# EAGLE board PCB (EAGLE 9.7.0)
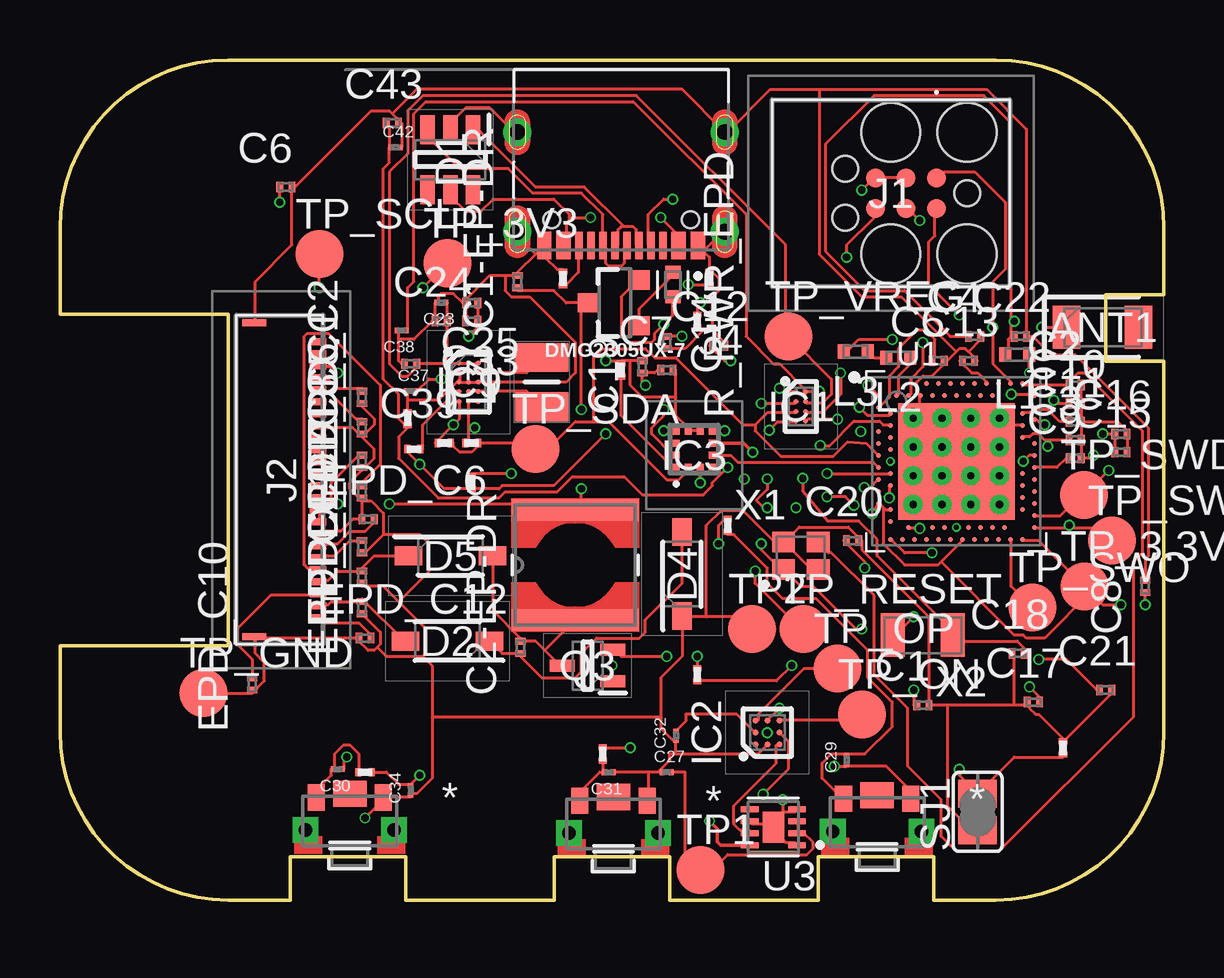
[diagram p0: board, top side]
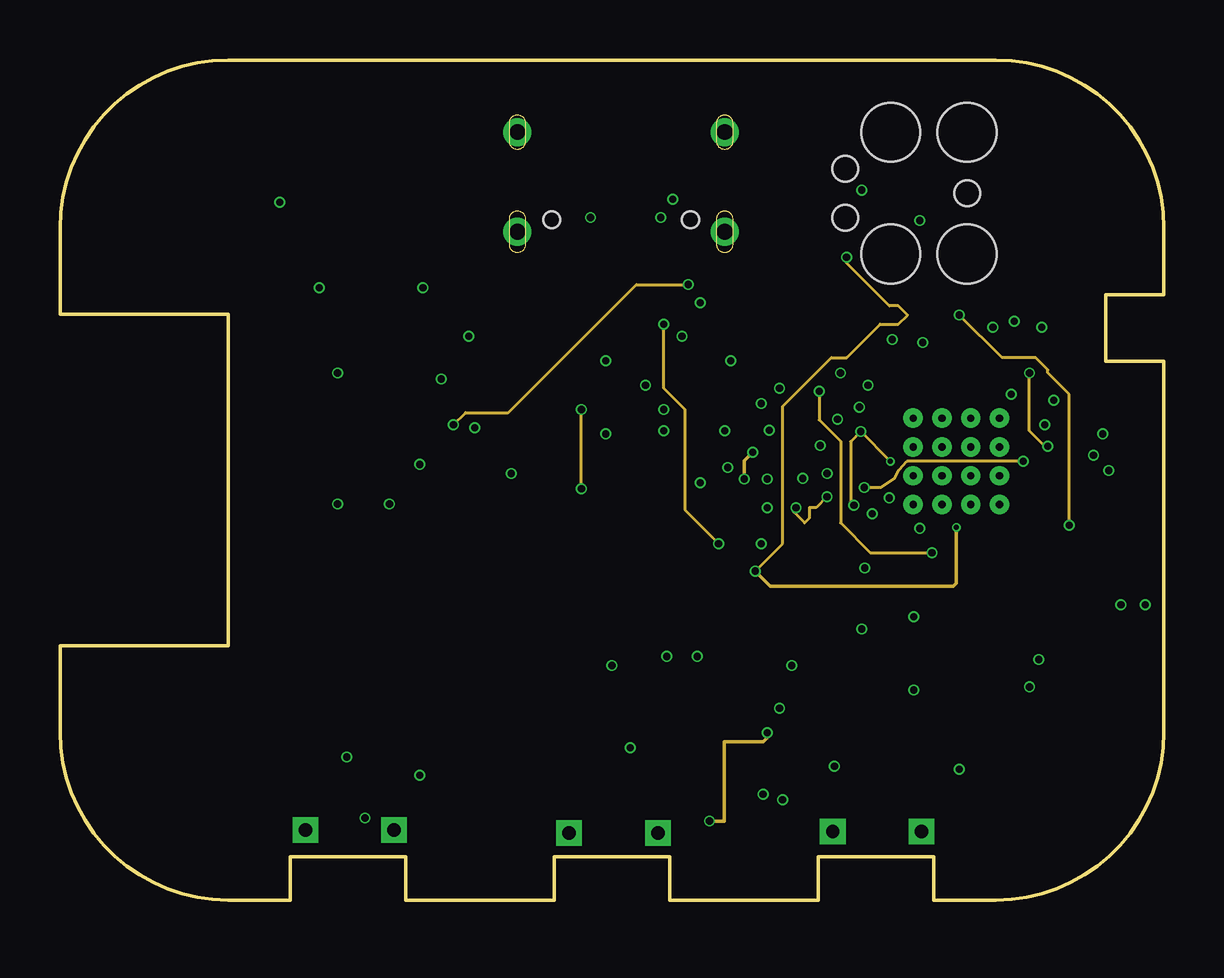
[diagram p1: board, inner layer Route2]
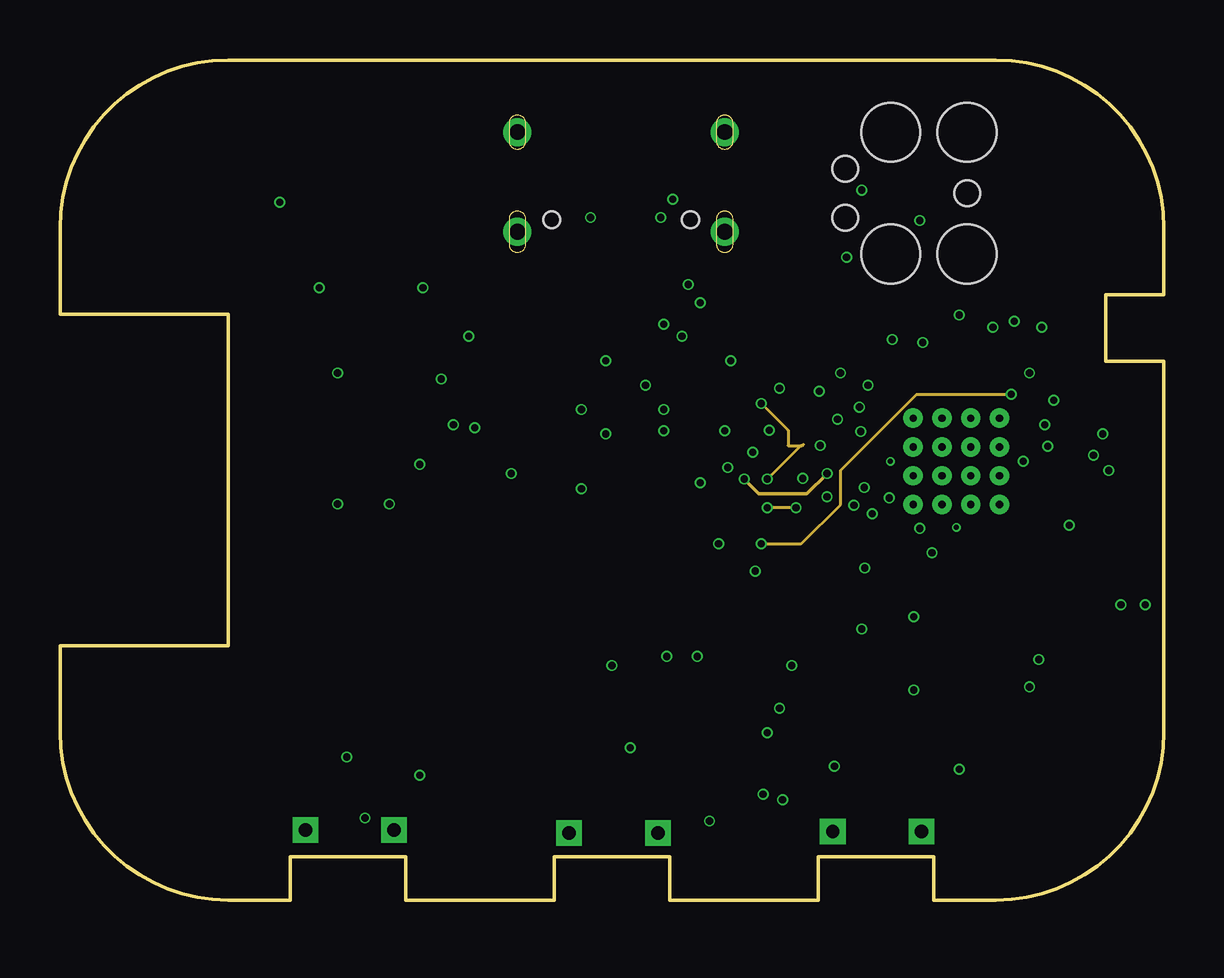
[diagram p2: board, inner layer Route63]
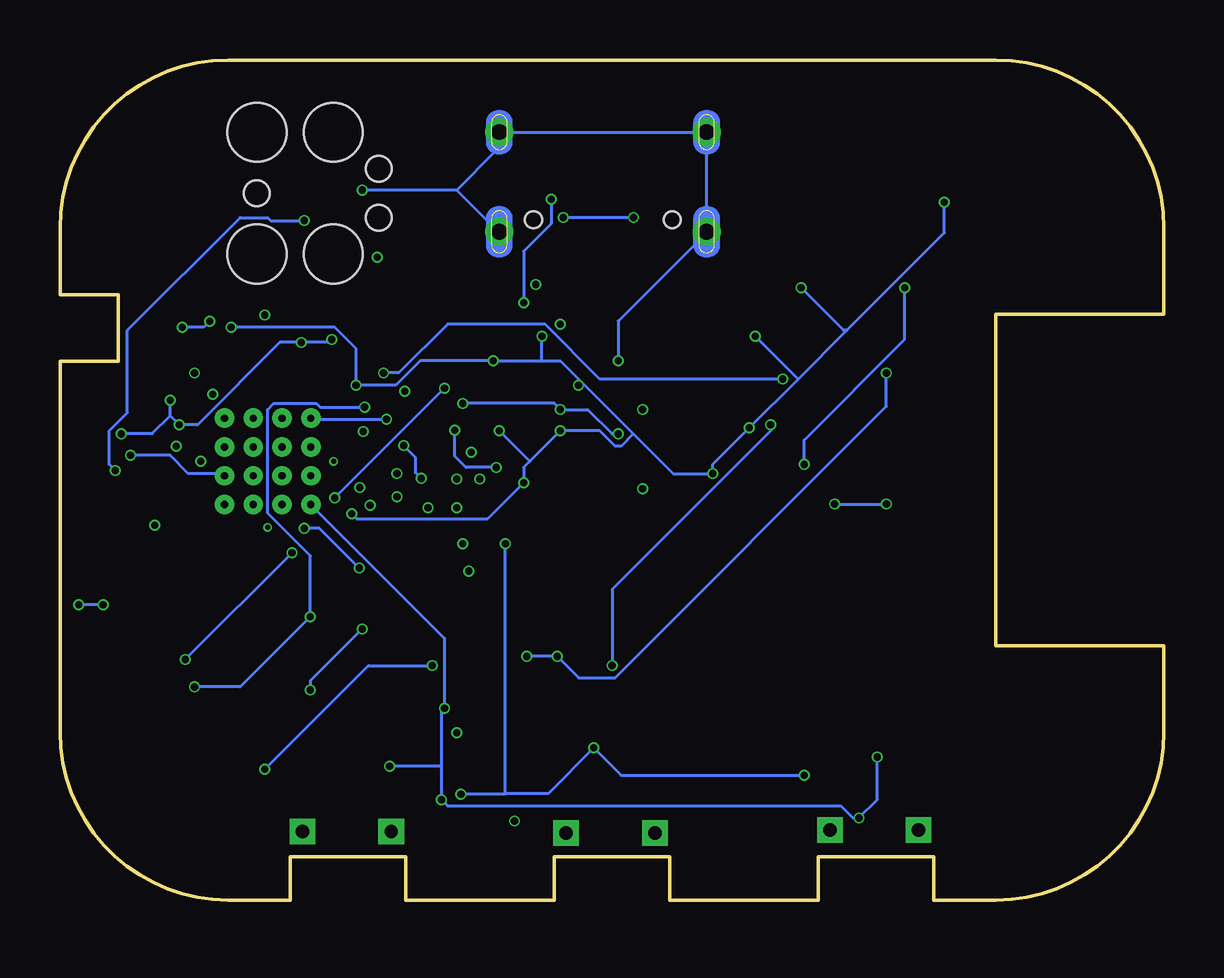
[diagram p3: board, bottom side, seen from below]

Size 46 x 35 mm. Coordinates in mm from the lower left corner, seen from the top.
Outline: 39,0 36.4,0 36.4,1.8 31.6,1.8 31.6,0 25.4,0 25.4,1.8 20.6,1.8 20.6,0 14.4,0 14.4,1.8 9.6,1.8 9.6,0 7,0 arc-90 0,7 0,10.6 7,10.6 7,24.4 0,24.4 0,28 arc-90 7,35 39,35 arc-90 46,28 46,25.23 43.57,25.23 43.57,22.45 46,22.45 46,7 arc-90 39,0
Copper layers (1+2*15+16): Top / Route2 / Route63 / Bottom
Stack-up 4 Layer Stack: Top SilkScreen Epoxy Ink / Top SolderMask SR:Green 0.0254mm Dk 4.3 / Top Surface Finish Lead-Free 0.02mm / Top CuFoil:007 0.035mm / Dielectric-1 Prepreg:001 0.064mm / Dielectric-2 Prepreg:001 0.064mm / Route2 CuFoil:007 0.035mm / Dielectric-3 Core:066 0.711mm / Route63 CuFoil:007 0.035mm / Dielectric-4 Prepreg:001 0.064mm / Dielectric-5 Prepreg:001 0.064mm / Bottom CuFoil:007 0.035mm / Bottom Surface Finish Lead-Free 0.02mm / Bottom SolderMask SR:Green 0.0254mm Dk 4.3 / Bottom SilkScreen Epoxy Ink
Design rules: minimum copper width 5mil, minimum drill size 0.3mm, copper clearance wire_polygon to wire_polygon 5mil, copper clearance wire_polygon to pad_smd 5mil, copper clearance wire_polygon to via 5mil, copper clearance pad_smd to pad_smd 5mil, copper clearance pad_smd to via 5mil, copper clearance via to via 5mil, copper clearance smd to pad (same net) 5mil, copper clearance smd to via (same net) 5mil, copper clearance smd to smd (same net) 5mil, dimension clearance 0.2mm, via restrict clearance 0mil, restrict clearance 0mil, drill distance 6mil, keepout clearance 0mil

## Footprints (pad centres in the part's own frame; a part is rotated, then mirrored left to right if it is on the bottom)
2450AT18B100E_ANTC3216X140N = smd 1.15 x 1.8: 1 -1.5,0; 2 1.5,0
NORDIC_NRF_3_RESC0201_L = smd 0.28 x 0.43: 1 -0.255,0; 2 0.255,0
GRM011R60J152KE01L_2_CAPC0201X13N = smd 0.22 x 0.23: 1 -0.185,0; 2 0.185,0
ESP32_C6_LIBRARY_3_SOT95P280X145-6N = smd 1.2 x 0.6: 1 -1.25,0.95; 2 -1.25,0; 3 -1.25,-0.95; 4 1.25,-0.95; 5 1.25,0; 6 1.25,0.95
ESP32_C6_LIBRARY_5_SOD3716X135N = smd 1.15 x 0.8: 1 -1.75,0; 2 1.75,0
ESP32_C6_LIBRARY_4_ESP32_C6_LIBRARY_4_ESP32_C6_LIBRARY_4_ESP32_C6_LIBRARY_4_ESP32_WROVER_SPARKFUN-DISCRETESEMI_SOT23-3 = smd 0.8 x 0.9: 1 -0.95,-1; 2 0.95,-1; 3 0,1.1
BQ25180YBGR_BGA8C40P2X4_100X155X50 = smd 0.2 x 0.2: A1 -0.2,0.6; A2 0.2,0.6; B1 -0.2,0.2; B2 0.2,0.2; C1 -0.2,-0.2; C2 0.2,-0.2; D1 -0.2,-0.6; D2 0.2,-0.6
DRV2605YZFR_BGA9C50P3X3_144X144X62 = smd 0.25 x 0.25: A1 -0.5,0.5; A2 0,0.5; A3 0.5,0.5; B1 -0.5,0; B2 0,0; B3 0.5,0; C1 -0.5,-0.5; C2 0,-0.5; C3 0.5,-0.5
BMA423_BMA423 = smd 0.3 x 0.35: 1 -0.75,-0.775; 2 -0.25,-0.775; 3 0.25,-0.775; 4 0.75,-0.775; 7 0.75,0.775; 8 0.25,0.775; 9 -0.25,0.775; 10 -0.75,0.775 | smd 0.35 x 0.3: 5 0.775,-0.25; 6 0.775,0.25; 11 -0.775,0.25; 12 -0.775,-0.25
RT6160AWSC_BGA15C40P3X5_140X230X60 = smd 0.216 x 0.216: A1 -0.4,0.8; A2 0,0.8; A3 0.4,0.8; B1 -0.4,0.4; B2 0,0.4; B3 0.4,0.4; C1 -0.4,0; C2 0,0; C3 0.4,0; D1 -0.4,-0.4; D2 0,-0.4; D3 0.4,-0.4; E1 -0.4,-0.8; E2 0,-0.8; E3 0.4,-0.8
TC2030-IDC_TC2030IDC = smd 0.783 x 0.783: 1 -0.953,-0.635; 2 -0.953,0.635; 3 0.317,-0.635; 4 0.317,0.635; 5 1.588,-0.635; 6 1.588,0.635 | hole 2.451: -2.223,-2.54; -2.223,2.54; 0.952,-2.54; 0.952,2.54 | hole 1.067: -2.223,0; 2.857,-1.016; 2.857,1.016
503480-2400_5034802400 = smd 0.3 x 0.7: 1 -5.75,1.525; 2 -5.25,1.525; 3 -4.75,1.525; 4 -4.25,1.525; 5 -3.75,1.525; 6 -3.25,1.525; 7 -2.75,1.525; 8 -2.25,1.525; 9 -1.75,1.525; 10 -1.25,1.525; 11 -0.75,1.525; 12 -0.25,1.525; 13 0.25,1.525; 14 0.75,1.525; 15 1.25,1.525; 16 1.75,1.525; 17 2.25,1.525; 18 2.75,1.525; 19 3.25,1.525; 20 3.75,1.525; 21 4.25,1.525; 22 4.75,1.525; 23 5.25,1.525; 24 5.75,1.525 | smd 0.3 x 1: MP1 -6.54,-1.125; MP2 6.54,-1.125
KH-TYPE-C-16P_KINGHELM_KH-TYPE-C-16P = smd 0.6 x 1.15: A1_B12 -3.2,4.725; A4_B9 -2.4,4.725; A9_B4 2.4,4.725; A12_B1 3.2,4.725 | smd 0.3 x 1.15: A5 -1.25,4.725; A6 -0.25,4.725; A7 0.25,4.725; A8 1.25,4.725; B5 1.75,4.725; B6 0.75,4.725; B7 -0.75,4.725; B8 -1.75,4.725 | drill 0.65 pad 1.05: SH1 -4.32,0; SH2 4.32,0; SH3 -4.32,4.15; SH4 4.32,4.15 | hole 0.7: -2.89,3.65; 2.89,3.65
NORDIC_NRF_2_RESC0402_L = smd 0.5 x 0.6: 1 -0.5,0; 2 0.5,0
ESP32_C6_LIBRARY_2_IND_4828-WE-TPC_WRE = smd 0.9 x 5.3: 1 -2.286,0; 2 2.286,0
MLP2016SR47MT0S1_INDC2016X100N = smd 1.2 x 2.2: 1 -1.028,0; 2 1.028,0
ESP32_C6_LIBRARY_6_SOT65P210X110-3N = smd 1.05 x 0.5: 1 -1.05,0.65; 2 -1.05,-0.65; 3 1.05,0
CPF0201D7K68C1_0201 = smd 0.35 x 0.25: 1 0,0.275; 2 0,-0.275
RESC1005X40 = smd 0.535 x 0.644: 1 -0.507,0; 2 0.507,0
ESP32_C6_LIBRARY_7_JUMPER_SJ = smd 1.168 x 1.6: 1 -0.762,0; 2 0.762,0
2025-10-22_07-23-44_LIBRARY_SW_EVP-AKE31A_PAN = smd 0.711 x 1.092: 1 -1.4,-0.972; 2 1.4,-0.972 | drill 0.559 pad 0.914 square: 3 -1.848,0.381; 4 1.848,0.381 | smd 1.397 x 1.092: 5 0,-1.124
HECTOR_WATCH_1_TP20R = smd 2 x 2: TP 0,0
NORDIC_NRF_4_AQFN50P700X700X85_HS-74N = smd 4.85 x 4.85: P$74 0,0 | drill 0.3 pad 0.6: P$75 -1.8,1.8; P$76 -0.6,1.8; P$77 0.6,1.8; P$78 1.8,1.8; P$79 -1.8,0.6; P$80 -0.6,0.6; P$81 0.6,0.6; P$82 1.8,0.6; P$83 -1.8,-0.6; P$84 -0.6,-0.6; P$85 0.6,-0.6; P$86 1.8,-0.6; P$87 -1.8,-1.8; P$88 -0.6,-1.8; P$89 0.6,-1.8; P$90 1.8,-1.8 | smd 0.2 x 0.2: P$A8 -1.25,3.25; P$A10 -0.75,3.25; P$A12 -0.25,3.25; P$A14 0.25,3.25; P$A16 0.75,3.25; P$A18 1.25,3.25; P$A20 1.75,3.25; P$A22 2.25,3.25; P$A23 2.75,3.25; P$AA24 3.25,-2.25; P$AB2 -2.75,-2.5; P$AC5 -2,-2.75; P$AC9 -1,-2.75; P$AC11 -0.5,-2.75; P$AC13 0,-2.75; P$AC15 0.5,-2.75; P$AC17 1,-2.75; P$AC19 1.5,-2.75; P$AC21 2,-2.75; P$AC24 3.25,-2.75; P$AD2 -2.75,-3.25; P$AD4 -2.25,-3.25; P$AD6 -1.75,-3.25; P$AD8 -1.25,-3.25; P$AD10 -0.75,-3.25; P$AD12 -0.25,-3.25; P$AD14 0.25,-3.25; P$AD16 0.75,-3.25; P$AD18 1.25,-3.25; P$AD20 1.75,-3.25; P$AD22 2.25,-3.25; P$AD23 2.75,-3.25; P$B1 -3.25,2.75; P$B3 -2.5,2.75; P$B5 -2,2.75; P$B7 -1.5,2.75; P$B9 -1,2.75; P$B11 -0.5,2.75; P$B13 0,2.75; P$B15 0.5,2.75; P$B17 1,2.75; P$B19 1.5,2.75; P$B24 3.25,2.75; P$C1 -3.25,2.25; P$D2 -2.75,2; P$D23 2.75,2; P$E24 3.25,1.75; P$F2 -2.75,1.5; P$F23 2.75,1.5; P$G1 -3.25,1.25; P$H2 -2.75,1; P$H23 2.75,1; P$J1 -3.25,0.75; P$J24 3.25,0.75; P$K2 -2.75,0.5; P$L1 -3.25,0.25; P$L24 3.25,0.25; P$M2 -2.75,0; P$N1 -3.25,-0.25; P$N24 3.25,-0.25; P$P2 -2.75,-0.5; P$P23 2.75,-0.5; P$R1 -3.25,-0.75; P$R24 3.25,-0.75; P$T2 -2.75,-1; P$T23 2.75,-1; P$U1 -3.25,-1.25; P$U24 3.25,-1.25; P$V23 2.75,-1.5; P$W1 -3.25,-1.75; P$W24 3.25,-1.75; P$Y2 -2.75,-2; P$Y23 2.75,-2
ESP32_C6_LIBRARY_SON50P200X200X80-9N = smd 0.76 x 0.27: 1 -0.985,0.75; 2 -0.985,0.25; 3 -0.985,-0.25; 4 -0.985,-0.75; 5 0.985,-0.75; 6 0.985,-0.25; 7 0.985,0.25; 8 0.985,0.75 | smd 0.9 x 1.3: 9 0,0
NORDIC_NRF_BT-XTAL_2016_N = smd 0.95 x 0.85: 1 -0.725,-0.575; 2 0.725,-0.575; 3 0.725,0.575; 4 -0.725,0.575
NORDIC_NRF_1_XTAL_3215_N = smd 1 x 1.8: 1 -1.25,0; 2 1.25,0

## Placement (x,y rotation side)
ANT1  2450AT18B100E  [2450AT18B100E_ANTC3216X140N]  43.44,23.86 0 top
C1  12pF  [NORDIC_NRF_3_RESC0201_L]  35.95,8.12 0 top
C1-EP-DR  10uF  [NORDIC_NRF_3_RESC0201_L]  19.06,25.77 90 top
C2  12pF  [NORDIC_NRF_3_RESC0201_L]  42.3,21.45 0 top
C2-EP-DR  4.7uF/25V  [NORDIC_NRF_3_RESC0201_L]  19.19,10.53 90 top
C3  1pF  [NORDIC_NRF_3_RESC0201_L]  42.3,19.17 0 top
C4  1pF  [NORDIC_NRF_3_RESC0201_L]  38.11,23.48 0 top
C5  100nF  [NORDIC_NRF_3_RESC0201_L]  36.59,22.47 0 top
C6  4.7μF  [NORDIC_NRF_3_RESC0201_L]  9.41,29.71 0 top
C7  100nF  [NORDIC_NRF_3_RESC0201_L]  25.28,22.09 0 top
C8  100nF  [NORDIC_NRF_3_RESC0201_L]  45.22,13.07 90 top
C9  820pF  [NORDIC_NRF_3_RESC0201_L]  42.3,18.4 0 top
C10  N.C  [NORDIC_NRF_3_RESC0201_L]  42.3,20.69 0 top
C11  100pF  [NORDIC_NRF_3_RESC0201_L]  42.3,19.93 0 top
C12  100nF  [NORDIC_NRF_3_RESC0201_L]  27.44,23.1 0 top
C13  N.C  [NORDIC_NRF_3_RESC0201_L]  37.85,22.47 0 top
C14  4.7μH  [NORDIC_NRF_3_RESC0201_L]  25.28,23.23 270 top
C15  1.0μF  [NORDIC_NRF_3_RESC0201_L]  44.2,18.66 0 top
C16  47nF  [NORDIC_NRF_3_RESC0201_L]  44.2,19.42 0 top
C17  12pF  [NORDIC_NRF_3_RESC0201_L]  40.56,8.24 0 top
C18  12pF  [NORDIC_NRF_3_RESC0201_L]  39.93,10.28 0 top
C19  100nF  [NORDIC_NRF_3_RESC0201_L]  24.27,22.21 90 top
C20  4.7μF  [NORDIC_NRF_3_RESC0201_L]  33.03,14.98 0 top
C21  4.7μF  [NORDIC_NRF_3_RESC0201_L]  43.57,8.75 0 top
C22  N.C  [NORDIC_NRF_3_RESC0201_L]  40.01,23.48 0 top
C23  0.1uF  [GRM011R60J152KE01L_2_CAPC0201X13N]  15.88,24.9 180 top
C24  10uF  [NORDIC_NRF_3_RESC0201_L]  15.88,24.12 0 top
C25  22uF  [NORDIC_NRF_3_RESC0201_L]  17.15,24.88 180 top
C27  0.1uF  [GRM011R60J152KE01L_2_CAPC0201X13N]  25.28,5.32 0 top
C29  1uF  [GRM011R60J152KE01L_2_CAPC0201X13N]  32.77,5.83 90 top
C30  1uF  [GRM011R60J152KE01L_2_CAPC0201X13N]  11.57,5.45 180 top
C31  1uF  [GRM011R60J152KE01L_2_CAPC0201X13N]  22.87,5.32 180 top
C32  1uF  [GRM011R60J152KE01L_2_CAPC0201X13N]  25.66,6.85 90 top
C33  22uF  [NORDIC_NRF_3_RESC0201_L]  17.15,24.12 180 top
C34  0.1uF  [GRM011R60J152KE01L_2_CAPC0201X13N]  14.61,4.56 90 top
C37  1uF  [GRM011R60J152KE01L_2_CAPC0201X13N]  14.61,21.2 0 top
C38  1uF  [GRM011R60J152KE01L_2_CAPC0201X13N]  14.23,23.74 180 top
C39  10uF  [NORDIC_NRF_3_RESC0201_L]  14.61,22.34 180 top
C42  0.1uF  [GRM011R60J152KE01L_2_CAPC0201X13N]  13.98,31.36 0 top
C43  4.7uF  [NORDIC_NRF_3_RESC0201_L]  13.85,32.37 0 top
D1  USBLC6-2SC6Y  [ESP32_C6_LIBRARY_3_SOT95P280X145-6N]  16.26,30.85 270 top
D2  MBR0530  [ESP32_C6_LIBRARY_5_SOD3716X135N]  16.14,10.78 180 top
D4  MBR0530  [ESP32_C6_LIBRARY_5_SOD3716X135N]  25.92,13.58 90 top
D5  MBR0530  [ESP32_C6_LIBRARY_5_SOD3716X135N]  16.26,14.34 0 top
DMG2305UX-7  20V/4.2A/52mΩ/1.4W  [ESP32_C6_LIBRARY_4_ESP32_C6_LIBRARY_4_ESP32_C6_LIBRARY_4_ESP32_C6_LIBRARY_4_ESP32_WROVER_SPARKFUN-DISCRETESEMI_SOT23-3]  23.12,24.88 90 top
EPD_C1  1uF/50V  [NORDIC_NRF_3_RESC0201_L]  12.58,19.67 90 top
EPD_C2  1uF/50V  [NORDIC_NRF_3_RESC0201_L]  12.58,20.94 90 top
EPD_C5  0.1uF/50V  [NORDIC_NRF_3_RESC0201_L]  12.58,18.28 90 top
EPD_C6  1uF/50V  [NORDIC_NRF_3_RESC0201_L]  12.84,15.86 0 top
EPD_C7  1uF/50V  [NORDIC_NRF_3_RESC0201_L]  12.58,14.72 90 top
EPD_C8  1uF/50V  [NORDIC_NRF_3_RESC0201_L]  12.58,17.01 90 top
EPD_C9  1uF/50V  [NORDIC_NRF_3_RESC0201_L]  12.58,13.45 90 top
EPD_C10  1uF/50V  [NORDIC_NRF_3_RESC0201_L]  8.01,9.01 90 top
EPD_C11  1uF/50V  [NORDIC_NRF_3_RESC0201_L]  12.58,12.18 90 top
EPD_C12  1uF/50V  [NORDIC_NRF_3_RESC0201_L]  12.71,10.91 0 top
IC1  BQ25180YBGR  [BQ25180YBGR_BGA8C40P2X4_100X155X50]  30.87,20.56 0 top
IC2  DRV2605YZFR  [DRV2605YZFR_BGA9C50P3X3_144X144X62]  29.47,6.97 90 top
IC3  BMA421  [BMA423_BMA423]  26.43,18.78 0 top
IC9  RT6160AWSC  [RT6160AWSC_BGA15C40P3X5_140X230X60]  17.03,21.58 0 top
J1  TC2030-IDC  [TC2030-IDC_TC2030IDC]  35.57,29.45 180 top
J2  503480-2400  [503480-2400_5034802400]  9.23,17.52 270 top
J4  KH-TYPE-C-16P  [KH-TYPE-C-16P_KINGHELM_KH-TYPE-C-16P]  23.38,31.99 180 top
L1  3.9nH  [NORDIC_NRF_2_RESC0402_L]  39.89,22.72 180 top
L2  10μH  [NORDIC_NRF_2_RESC0402_L]  34.93,22.59 180 top
L3  15nH  [NORDIC_NRF_2_RESC0402_L]  33.16,22.85 180 top
L5  68uH  [ESP32_C6_LIBRARY_2_IND_4828-WE-TPC_WRE]  21.47,13.96 90 top
L7  FTC252012SR47MBCA  [MLP2016SR47MT0S1_INDC2016X100N]  20.07,21.58 270 top
Q3  SI1308EDL-T1-GE3  [ESP32_C6_LIBRARY_6_SOT65P210X110-3N]  21.98,9.77 180 top
R1_EP_DR  0.47  [CPF0201D7K68C1_0201]  26.55,9.39 180 top
R1_USB  5K1  [CPF0201D7K68C1_0201]  26.55,24.12 180 top
R2  0  [CPF0201D7K68C1_0201]  16.01,19.04 270 top
R2_EP_DR  10K  [CPF0201D7K68C1_0201]  27.06,25.9 0 top
R2_USB  5K1  [CPF0201D7K68C1_0201]  20.96,25.9 180 top
R3  0  [CPF0201D7K68C1_0201]  23.38,22.09 0 top
R4  0  [CPF0201D7K68C1_0201]  14.74,18.78 90 top
R5  10K  [CPF0201D7K68C1_0201]  12.71,5.32 90 top
R7  10K  [CPF0201D7K68C1_0201]  27.82,15.61 180 top
R8  10K  [CPF0201D7K68C1_0201]  22.62,6.09 180 top
R9  10K  [CPF0201D7K68C1_0201]  14.49,20.05 0 top
R17  3K3  [CPF0201D7K68C1_0201]  17.15,17.39 0 top
R18  3K3  [CPF0201D7K68C1_0201]  17.15,19.04 90 top
R_PWR_EPD  10K  [RESC1005X40]  25.54,25.64 270 top
R_TYPE_SEL  2.2  [CPF0201D7K68C1_0201]  41.79,6.34 0 top
SJ1  [ESP32_C6_LIBRARY_7_JUMPER_SJ]  38.24,3.67 90 top
SW_DN  2025-10-22_07-23-44_LIBRARY_EVP-AKE31ASW_EVP-AKE31A_PAN  [2025-10-22_07-23-44_LIBRARY_SW_EVP-AKE31A_PAN]  34.04,3.24 180 top
SW_ENT  2025-10-22_07-23-44_LIBRARY_EVP-AKE31ASW_EVP-AKE31A_PAN  [2025-10-22_07-23-44_LIBRARY_SW_EVP-AKE31A_PAN]  23.06,3.17 180 top
SW_UP  2025-10-22_07-23-44_LIBRARY_EVP-AKE31ASW_EVP-AKE31A_PAN  [2025-10-22_07-23-44_LIBRARY_SW_EVP-AKE31A_PAN]  12.07,3.3 180 top
TP1  HECTOR_WATCH_1_TPTP20R  [HECTOR_WATCH_1_TP20R]  26.68,1.26 0 top
TP2  HECTOR_WATCH_1_TPTP20R  [HECTOR_WATCH_1_TP20R]  28.84,11.29 0 top
TP_3.3V  HECTOR_WATCH_1_TPTP20R  [HECTOR_WATCH_1_TP20R]  42.68,13.07 0 top
TP_3V3  HECTOR_WATCH_1_TPTP20R  [HECTOR_WATCH_1_TP20R]  16.14,26.53 0 top
TP_GND  HECTOR_WATCH_1_TPTP20R  [HECTOR_WATCH_1_TP20R]  5.98,8.62 0 top
TP_ON  HECTOR_WATCH_1_TPTP20R  [HECTOR_WATCH_1_TP20R]  33.41,7.74 0 top
TP_OP  TP_OP  [HECTOR_WATCH_1_TP20R]  32.39,9.64 0 top
TP_RESET  HECTOR_WATCH_1_TPTP20R  [HECTOR_WATCH_1_TP20R]  30.99,11.29 0 top
TP_SCL  HECTOR_WATCH_1_TPTP20R  [HECTOR_WATCH_1_TP20R]  10.8,26.91 0 top
TP_SDA  HECTOR_WATCH_1_TPTP20R  [HECTOR_WATCH_1_TP20R]  19.82,18.78 0 top
TP_SWDCLK  HECTOR_WATCH_1_TPTP20R  [HECTOR_WATCH_1_TP20R]  42.67,16.88 0 top
TP_SWDIO  HECTOR_WATCH_1_TPTP20R  [HECTOR_WATCH_1_TP20R]  43.82,14.98 0 top
TP_SWO  HECTOR_WATCH_1_TPTP20R  [HECTOR_WATCH_1_TP20R]  40.52,12.18 0 top
TP_VREG  HECTOR_WATCH_1_TPTP20R  [HECTOR_WATCH_1_TP20R]  30.36,23.48 0 top
U1  NRF52840_QF  [NORDIC_NRF_4_AQFN50P700X700X85_HS-74N]  37.35,18.28 0 top
U3  MAX17048G+T10  [ESP32_C6_LIBRARY_SON50P200X200X80-9N]  29.73,3.04 180 top
X1  32MHz  [NORDIC_NRF_BT-XTAL_2016_N]  30.87,14.34 0 top
X2  32.768kHz  [NORDIC_NRF_1_XTAL_3215_N]  35.95,11.04 180 top

## Library data of the parts
ANT1 = InkTime_v5; ARROW_PART_NUMBER: 2450AT18B100E; ARROW_PRICE-STOCK: https://www.arrow.com/en/products/2450at18b100e/johanson-dielectrics?utm_currency=USD&region=nac; DESCRIPTION: Antennas 2.45GHz ANTENNA; HEIGHT: 1.4mm; MANUFACTURER_NAME: JOHANSON TECHNOLOGY; MANUFACTURER_PART_NUMBER: 2450AT18B100E; MOUSER_PART_NUMBER: 609-2450AT18B100E; MOUSER_PRICE-STOCK: https://www.mouser.co.uk/ProductDetail/Johanson-Technology/2450AT18B100E?qs=yCnrNFeXz%252Bh5MFsFIXGZGA%3D%3D
C1 C1-EP-DR C2 C2-EP-DR C3-C22 C24 C25 C33 C39 C43 EPD_C1 EPD_C2 EPD_C5-EPD_C12 L1-L3 R1_EP_DR R1_USB R2 R2_EP_DR R2_USB R3-R5 R7-R9 R17 R18 R_TYPE_SEL SJ1 TP1 TP2 TP_3.3V TP_3V3 TP_GND TP_ON TP_OP TP_RESET TP_SCL TP_SDA TP_SWDCLK TP_SWDIO TP_SWO TP_VREG U1 X1 X2 = InkTime_v5
C23 C27 C29-C32 C34 C37 C38 C42 = InkTime_v5; AVAILABILITY: In Stock; CHECK_PRICES: https://www.snapeda.com/parts/GRM011R60J152KE01L/Murata/view-part/?ref=eda; DESCRIPTION: SMD Capacitor X5R(EIA) with Capacitance: 1500pF Tol. 10%. Rated Voltage: 6.3Vdc; MF: Murata; MP: GRM011R60J152KE01L; PACKAGE: 0201 Murata; PRICE: None; SNAPEDA_LINK: https://www.snapeda.com/parts/GRM011R60J152KE01L/Murata/view-part/?ref=snap
D1 = InkTime_v5; AVAILABILITY: In Stock; CHECK_PRICES: https://www.snapeda.com/parts/USBLC6-2SC6Y/STMicroelectronics/view-part/?ref=eda; DESCRIPTION: 17V Clamp 5A (8/20µs) Ipp Tvs Diode Surface Mount SOT-23-6; MF: STMicroelectronics; MP: USBLC6-2SC6Y; PACKAGE: SOT-23-6 STMicroelectronics; PRICE: None; SNAPEDA_LINK: https://www.snapeda.com/parts/USBLC6-2SC6Y/STMicroelectronics/view-part/?ref=snap
D2 D4 D5 = InkTime_v5; AVAILABILITY: In Stock; CHECK_PRICES: https://www.snapeda.com/parts/MBR0530/Onsemi/view-part/?ref=eda; DESCRIPTION: Diode Schottky 30 V 500mA Surface Mount SOD-123; MF: ON Semiconductor; MP: MBR0530; PACKAGE: SOD-123-2 ON Semiconductor; PRICE: None; PURCHASE-URL: https://www.snapeda.com/api/url_track_click_mouser/?unipart_id=179458&manufacturer=ON Semiconductor&part_name=MBR0530&search_term=None; SNAPEDA_LINK: https://www.snapeda.com/parts/MBR0530/Onsemi/view-part/?ref=snap
DMG2305UX-7 = InkTime_v5; PROD_ID: TRAN-14388
IC1 = InkTime_v5; ARROW_PART_NUMBER: BQ25180YBGR; ARROW_PRICE-STOCK: https://www.arrow.com/en/products/bq25180ybgr/texas-instruments?utm_currency=USD&region=nac; DESCRIPTION: Charger IC Lithium Ion/Polymer, Lithium Iron Phosphate 8-DSBGA (1.6x1.1); HEIGHT: 0.5mm; MANUFACTURER_NAME: Texas Instruments; MANUFACTURER_PART_NUMBER: BQ25180YBGR; MOUSER_PART_NUMBER: 595-BQ25180YBGR; MOUSER_PRICE-STOCK: https://www.mouser.co.uk/ProductDetail/Texas-Instruments/BQ25180YBGR?qs=doiCPypUmgEWjAK%252BJAX6Tw%3D%3D
IC2 = InkTime_v5; ARROW_PART_NUMBER: DRV2605YZFR; ARROW_PRICE-STOCK: https://www.arrow.com/en/products/drv2605yzfr/texas-instruments?region=nac; DESCRIPTION: Haptic Driver for ERM/LRA with Built-In Library and Smart Loop Architecture; HEIGHT: 0.625mm; MANUFACTURER_NAME: Texas Instruments; MANUFACTURER_PART_NUMBER: DRV2605YZFR
IC3 = InkTime_v5; ARROW_PART_NUMBER: BMA423; ARROW_PRICE-STOCK: https://www.arrow.com/en/products/bma423/bosch; DESCRIPTION: Accelerometers Triaxial low-g 12bit Acceleration Sensor; HEIGHT: 1mm; MANUFACTURER_NAME: BOSCH; MANUFACTURER_PART_NUMBER: BMA423; MOUSER_PART_NUMBER: 262-BMA423; MOUSER_PRICE-STOCK: https://www.mouser.co.uk/ProductDetail/Bosch-Sensortec/BMA423?qs=HXFqYaX1Q2xC%252BSgeGoX3mg%3D%3D
IC9 = InkTime_v5; DESCRIPTION: Buck-Boost Regulator Positive Output Step-Up/Step-Down I2C DC-DC Controller IC 15-WL-CSP (BSC) (1.4x2.3); HEIGHT: 0.6mm; MANUFACTURER_NAME: RICHTEK; MANUFACTURER_PART_NUMBER: RT6160AWSC; MOUSER_PART_NUMBER: 835-RT6160AWSC; MOUSER_PRICE-STOCK: https://www.mouser.co.uk/ProductDetail/Richtek/RT6160AWSC?qs=amGC7iS6iy%2FLd9PSoixZXQ%3D%3D
J1 = InkTime_v5; DESCRIPTION: CABLE ADAPTER 6 POS; HEIGHT: 19mm; MANUFACTURER_NAME: Tag Connect; MANUFACTURER_PART_NUMBER: TC2030-IDC
J2 = InkTime_v5; DESCRIPTION: FFC & FPC Connectors 0.5mm FPC RA SMT Dual Contact 24Ckt; HEIGHT: 1.87mm; MANUFACTURER_NAME: Molex; MANUFACTURER_PART_NUMBER: 503480-2400; MOUSER_PART_NUMBER: 538-503480-2400; MOUSER_PRICE-STOCK: https://www.mouser.co.uk/ProductDetail/Molex/503480-2400?qs=OAhjpuo3Vu7efIoxFh9AOw%3D%3D
J4 = InkTime_v5; AVAILABILITY: Not in stock; CHECK_PRICES: https://www.snapeda.com/parts/KH-TYPE-C-16P/Kinghelm/view-part/?ref=eda; MF: kinghelm; MP: KH-TYPE-C-16P; PACKAGE: None; PRICE: None; SNAPEDA_LINK: https://www.snapeda.com/parts/KH-TYPE-C-16P/Kinghelm/view-part/?ref=snap
L5 = InkTime_v5; COPYRIGHT: Copyright (C) 2024 Ultra Librarian. All rights reserved.; MANUFACTURER_PART_NUMBER: 744043680; MFR_NAME: Wurth Electronics
L7 = InkTime_v5; DESCRIPTION: SMD / SMT Inductors (Coils), L=0.47?H, L x W x T :; HEIGHT: 1mm; JLCPCB: https://jlcpcb.com/partdetail/6763488-FTC252012SR47MBCA/C5832368; MANUFACTURER_NAME: TDK; MANUFACTURER_PART_NUMBER: FTC252012SR47MBCA
Q3 = InkTime_v5; AVAILABILITY: In Stock; CHECK_PRICES: https://www.snapeda.com/parts/SI1308EDL-T1-GE3/Vishay+Siliconix/view-part/?ref=eda; DESCRIPTION: Si1308EDL-T1-GE3 N-channel MOSFET Transistor, 1.5 A, 30 V, 3-Pin SC-70 | Siliconix / Vishay SI1308EDL-T1-GE3; MF: Vishay Siliconix; MP: SI1308EDL-T1-GE3; PACKAGE: SOT-323 Vishay Semiconductor; PRICE: None; PURCHASE-URL: https://www.snapeda.com/api/url_track_click_mouser/?unipart_id=274603&manufacturer=Vishay Siliconix&part_name=SI1308EDL-T1-GE3&search_term=None; SNAPEDA_LINK: https://www.snapeda.com/parts/SI1308EDL-T1-GE3/Vishay+Siliconix/view-part/?ref=snap
R_PWR_EPD = Tinkercad; CATEGORY: Resistor; SUB-CATEGORY: Fixed
SW_DN SW_ENT SW_UP = InkTime_v5; COPYRIGHT: Copyright (C) 2025 Ultra Librarian. All rights reserved.; DIGI-KEY_PART_NUMBER_1: P123437TR-ND; DIGI-KEY_PART_NUMBER_2: P123437CT-ND; DIGI-KEY_PART_NUMBER_3: P123437DKR-ND; MANUFACTURER_NAME: Panasonic; MANUFACTURER_PART_NUMBER: EVP-AKE31A
U3 = InkTime_v5; AVAILABILITY: In Stock; CHECK_PRICES: https://www.snapeda.com/parts/MAX17048G+T10/Analog+Devices/view-part/?ref=eda; DESCRIPTION: 3µA 1-Cell/2-Cell Fuel Gauge with ModelGauge; MF: Analog Devices; MP: MAX17048G+T10; PACKAGE: TDFN-8 Maxim; PRICE: None; PURCHASE-URL: https://www.snapeda.com/api/url_track_click_mouser/?unipart_id=329239&manufacturer=Analog Devices&part_name=MAX17048G+T10&search_term=None; SNAPEDA_LINK: https://www.snapeda.com/parts/MAX17048G+T10/Analog+Devices/view-part/?ref=snap

## Nets
3V3/1.7D: C34.2 DMG2305UX-7.2 IC2.C2 R5.2 R7.2 R8.2 R_PWR_EPD.2
3V3/2.4A: C6.1 C7.1 C8.1 C12.1 C14.1 C19.1 C25.1 C33.1 IC3.3 IC3.7 IC3.10 IC9.E2 IC9.E3 J1.1 R17.1 R18.1 TP_3.3V.TP TP_3V3.TP U1.P$A22 U1.P$AD14 U1.P$AD23 U1.P$B1 U1.P$W1 U1.P$Y2
ALERT/1.6C: U3.5
ALERT/2.5C: U1.P$J24
D+/1.5D: D1.4
D+/2.7D: U1.P$AD6
D-/1.5D: D1.6
D-/2.7D: U1.P$AD4
DEC1: C5.1 U1.P$C1
DEC3: C11.1 U1.P$D23
DEC4_6: C10.1 C15.1 C16.1 L3.2 U1.P$B5 U1.P$E24
DN: D1.1 J4.A7 J4.B7
DP: D1.3 J4.A6 J4.B6
EPD_3V3: C1-EP-DR.1 DMG2305UX-7.3 EPD_C5.2 J2.15 J2.16 L5.2
EPD_BUSY/1.5D: J2.9
EPD_BUSY/2.2D: U1.P$AD12
EPD_CS/1.4C: J2.12
EPD_CS/2.2D: U1.P$K2
EPD_DC/1.5D: J2.11
EPD_DC/2.2D: U1.P$AD10
EPD_RST/1.5D: J2.10
EPD_RST/2.2D: U1.P$AC11
GDR: J2.2
GND: C1-EP-DR.2 C1.2 C2.2 C3.2 C4.2 C5.2 C6.2 C7.2 C8.2 C9.2 C10.2 C11.2 C12.2 C13.2 C14.2 C15.2 C16.2 C17.1 C18.1 C19.2 C20.2 C21.2 C22.2 C23.2 C24.1 C25.2 C27.1 C29.1 C30.1 C31.1 C32.1 C33.2 C34.1 C37.1 C38.2 C39.2 C42.2 C43.2 D1.2 D4.1 EPD_C1.1 EPD_C2.1 EPD_C5.1 EPD_C6.1 EPD_C7.1 EPD_C8.1 EPD_C9.1 EPD_C10.1 EPD_C11.1 EPD_C12.1 IC1.D2 IC2.B1 IC2.B3 IC3.8 IC3.9 IC9.B1 IC9.C1 IC9.C2 IC9.C3 J1.3 J1.5 J2.8 J2.17 J2.MP1 J2.MP2 J4.A1_B12 J4.A12_B1 J4.SH1 J4.SH2 J4.SH3 J4.SH4 R1_USB.1 R2_EP_DR.1 R2_USB.2 R3.1 R9.1 R_TYPE_SEL.1 SJ1.1 SW_DN.1 SW_ENT.1 SW_UP.1 TP2.TP TP_GND.TP U1.P$74 U1.P$75 U1.P$76 U1.P$77 U1.P$78 U1.P$79 U1.P$80 U1.P$81 U1.P$82 U1.P$83 U1.P$84 U1.P$85 U1.P$86 U1.P$87 U1.P$88 U1.P$89 U1.P$90 U1.P$B7 U1.P$F23 U3.1 U3.4 U3.6 U3.9 X1.2 X1.4
HAPTIC_EN/1.4C: IC2.A1
HAPTIC_EN/2.6A: U1.P$U1
IMU_INT1: IC3.5 U1.P$N1
IMU_INT2: IC3.6 U1.P$P2
LX1: IC9.B2 IC9.B3 L7.1
LX2: IC9.D2 IC9.D3 L7.2
MOSI/1.5B: J2.14
MOSI/2.2D: U1.P$B13
N$1: IC9.D1 R4.2
N$2: IC3.1 R3.2
N$3: IC9.E1 Q3.1 R2.2 R2_EP_DR.2
N$4: C2-EP-DR.2 D5.2 L5.1 Q3.3
N$5: C42.1 C43.1 IC1.D1 R9.2
N$6: C2-EP-DR.1 D2.1 D4.2
N$7: R1_EP_DR.1 R_TYPE_SEL.2 SJ1.2
N$8: C32.2 IC2.A2
N$9: J4.A5 R1_USB.2
N$10: EPD_C2.2 J2.4
N$11: EPD_C1.2 J2.5
N$14: J4.B5 R2_USB.1
N$17: C20.1 U1.P$AC5
N$19: EPD_C6.2 J2.18
N$21: EPD_C7.2 J2.19
N$22: EPD_C8.2 J2.20
N$24: EPD_C10.2 J2.22
N$26: EPD_C12.2 J2.24
N$46: C9.1 U1.P$N24
N$49: C3.1 L1.1 U1.P$H23
N$51: C2.1 U1.P$A23 X1.3
N$52: C1.1 U1.P$B24 X1.1
N$58: C13.1 U1.P$A18
N$69: L2.1 U1.P$B3
N$70: L2.2 L3.1
OUT+: IC2.A3 TP_OP.TP
OUT-: IC2.C3 TP_ON.TP
P0.00/XL1: C17.2 U1.P$D2 X2.2
P0.01/XL2: C18.2 U1.P$F2 X2.1
P0.04: U1.P$J1
P0.13/1.5D: C30.2 R5.1 SW_UP.2
P0.13/2.6C: U1.P$AD8
P0.14/1.5D: C31.2 R8.1 SW_ENT.2
P0.14/2.7C: U1.P$AC9
P0.19: U1.P$AC15
P0.20: U1.P$AD16
P0.21: U1.P$AC17
P0.22: U1.P$AD18
P0.23: U1.P$AC19
P0.24: U1.P$AD20
P0.25: U1.P$AC21
P0.26: U1.P$G1
P0.27: U1.P$H2
P0.28: U1.P$B11
P0.29: U1.P$A10
P0.30: U1.P$B9
P0.31: U1.P$A8
P1.01/1.6C: DMG2305UX-7.1 R_PWR_EPD.1
P1.01/2.4B: U1.P$Y23
P1.02/1.6C: C29.2 R7.1 SW_DN.2
P1.02/2.8C: U1.P$W24
P1.03: U1.P$V23
P1.04: U1.P$U24
P1.05: U1.P$T23
P1.06: U1.P$R24
P1.07: U1.P$P23
P1.09: U1.P$L24 U1.P$R1
P1.10: U1.P$A20
P1.11: U1.P$B19
P1.12: U1.P$B17
P1.13: U1.P$A16
P1.14: U1.P$B15
P1.15: U1.P$A14
PMIC_INT: IC1.A1 U1.P$T2
PREVGH: D5.1 EPD_C9.2 J2.21
PREVGL: D2.2 EPD_C11.2 J2.23
RESE: J2.3 Q3.2 R1_EP_DR.2
RESET: J1.6 TP_RESET.TP U1.P$AC13
RF: ANT1.1 C4.1 C22.1 L1.2
SCK/1.5B: J2.13
SCK/2.2D: U1.P$A12
SCL/1.4C: IC2.C1 U3.7
SCL/2.4C: IC1.B1 IC3.12 R4.1 R17.2 TP_SCL.TP U1.P$M2
SDA/1.4C: IC2.B2 U3.8
SDA/2.4C: IC1.C1 IC3.2 R2.1 R18.2 TP_SDA.TP U1.P$L1
SWDCLK: J1.4 TP_SWDCLK.TP U1.P$AA24
SWDIO: J1.2 TP_SWDIO.TP U1.P$AC24
SWO: TP_SWO.TP U1.P$AD22
VBAT/1.2A: C27.2 TP1.TP U3.2 U3.3
VBAT/2.5C: C37.2 IC1.C2
VBUS/1.5D: D1.5 J4.A4_B9 J4.A9_B4
VBUS/2.6D: C21.1 C38.1 IC1.A2 U1.P$AD2
VREG: C23.1 C24.2 C39.1 IC1.B2 IC9.A1 IC9.A2 IC9.A3 TP_VREG.TP

## Tracks (layer width: path | path; a pad name or v marks a point on that pad's centre or on a via)
3V3/1.7D  (via drill 0.3)
  Top 0.127: R_PWR_EPD.2 25.54,24.37 v25.15,23.99 24.77,23.61 24.77,23.36 24.65,23.23 23.63,23.23 23.38,23.48 23.38,25.13 24.01,25.77 DMG2305UX-7.2 | 14.61,4.81 14.11,4.81 13.6,5.32 R5.2 | v29.29,4.41 30.36,5.48 30.36,6.59 29.98,6.97 IC2.C2 | v23.76,6.34 22.62,6.34 R8.2 | v27.44,14.85 27.44,15.61 27.7,15.86 27.82,15.86 R7.2 | v14.99,5.2 14.61,4.81 | 14.61,4.81 C34.2
  Route2 0.127: v25.15,23.99 25.15,21.32 26.04,20.44 26.04,16.24 v27.44,14.85
  Bottom 0.127: 27.44,4.43 25.66,4.43 v23.76,6.34 22.62,5.2 v14.99,5.2 | v29.29,4.41 27.44,4.41 27.44,4.43 | 27.44,4.43 v27.44,14.85
3V3/2.4A  (via drill 0.3)
  Top 0.127: 34.3,16.37 34.43,16.24 34.55,16.24 U1.P$Y2 | 34.3,16.37 34.17,16.5 U1.P$W1 34.1,16.48 v33.84,16.09 | 36.71,14.09 36.59,13.96 35.19,13.96 34.3,14.85 34.3,16.37 | 36.71,14.09 37.6,14.98 U1.P$AD14 | U1.P$AD23 40.14,14.98 40.78,14.98 TP_3.3V.TP 42.93,12.82 | v45.22,12.31 C8.1 | v44.2,12.31 43.44,12.31 42.93,12.82 | 36.71,14.09 39.76,11.04 40.14,11.04 40.27,10.91 41.03,10.91 42.93,12.82 | U1.P$A22 39.63,21.58 38.87,22.34 v38.87,23.86 38.87,25.77 39.38,26.28 39.38,29.07 38.11,30.34 36.84,30.34 36.59,30.09 J1.1 | IC9.E3 17.41,20.82 17.03,20.82 IC9.E2 17.03,19.67 | 17.03,19.67 17.03,19.17 16.9,19.04 R18.1 | C7.1 24.9,22.09 24.77,21.96 C19.1 24.27,21.58 v24.39,21.45 | C33.1 C25.1 | v33.66,21.45 34.04,21.07 U1.P$B1 | v27.95,22.47 27.7,22.47 27.06,23.1 C12.1 | v18.8,17.77 17.15,17.77 R17.1 | v25.15,19.55 25.66,19.55 IC3.10 | v26.68,17.39 26.68,17.9 IC3.3 | v27.7,19.55 27.19,19.55 IC3.7 | v9.15,29.07 C6.1 | v25.92,23.48 C14.1 | C33.1 17.41,23.86 v17.03,23.48 | C33.1 | v17.28,19.67 17.03,19.67 | v15.12,25.52 TP_3V3.TP
  Bottom 0.127: v44.2,12.31 v45.22,12.31 | 24.27,21.58 25.15,22.47 25.92,22.47 | 24.27,21.58 22.11,19.42 | 22.11,19.42 20.46,17.77 v18.8,17.77 18.8,18.15 v17.28,19.67 15.25,21.71 | 25.92,22.47 v27.95,22.47 31,22.47 32.01,21.45 v33.66,21.45 33.66,22.98 34.55,23.86 v38.87,23.86 | 22.11,19.42 22.62,18.91 22.87,18.91 23.5,19.55 v25.15,19.55 26.43,18.28 | 26.43,18.28 26.68,18.02 v26.68,17.39 28.18,15.89 33.64,15.89 v33.84,16.09 | 26.43,18.28 v27.7,19.55 | v9.15,29.07 9.15,27.8 13.22,23.74 | 15.25,21.71 13.22,23.74 | 25.92,22.47 v25.92,23.48 | 15.25,21.71 v17.03,23.48 | 24.27,21.58 v24.39,21.45 | v15.12,25.52 13.34,23.74 13.22,23.74
DEC1
  Top 0.127: U1.P$C1 34.17,20.56 34.55,20.94 34.55,21.83 34.93,22.21 34.93,22.98 35.7,23.74 36.08,23.74 36.46,23.36 36.46,22.59 C5.1
DEC3
  Top 0.127: C11.1 41.66,19.93 41.16,20.44 40.52,20.44 40.4,20.31 40.14,20.31 U1.P$D23
DEC4_6  (via drill 0.3)
  Top 0.127: C15.1 C16.1 v43.44,19.42 | v35.95,23.23 35.95,22.21 35.44,21.71 35.44,21.07 U1.P$B5 | v34.68,23.36 33.28,23.36 32.77,22.85 L3.2 | v41.03,19.8 40.9,19.8 40.65,20.05 U1.P$E24 | C10.1 41.54,20.69 v41.41,20.82
  Bottom 0.127: v34.68,23.36 34.81,23.23 v35.95,23.23 36.84,23.23 40.27,19.8 v41.03,19.8 41.41,20.18 | 41.41,20.18 v41.41,20.82 | v43.44,19.42 42.17,19.42 41.41,20.18
DN
  Top 0.127: 23.5,28.06 23.88,28.06 24.01,27.93 24.01,27.29 J4.B7 | 23.5,28.06 23.38,28.06 23.25,27.93 23.25,27.29 J4.A7 | 23.5,28.06 21.85,29.71 19.82,29.71 17.54,31.99 17.28,31.99 D1.1
DP
  Top 0.127: J4.A6 23.5,27.17 23.5,26.53 23.38,26.41 22.87,26.41 22.74,26.53 22.74,27.17 J4.B6 22.62,27.29 22.62,28.56 21.73,29.45 19.69,29.45 18.68,30.47 16.65,30.47 15.38,31.74 15.38,31.99 D1.3
EPD_3V3  (via drill 0.3)
  Top 0.127: 11.31,16.5 11.31,17.39 12.45,18.53 EPD_C5.2 | 11.31,16.5 11.18,16.37 10.8,16.37 J2.15 10.8,16.24 10.8,15.86 J2.16 | 21.73,24.88 DMG2305UX-7.3 21.98,24.88 | 21.73,24.88 21.09,24.88 20.58,25.39 19.06,25.39 C1-EP-DR.1 | v21.73,20.44 21.73,24.88 | v21.73,17.13 21.73,16.5 L5.2 21.22,16.5 v13.73,16.5 | v11.57,16.5 11.31,16.5
  Route2 0.127: v21.73,17.13 v21.73,20.44
  Bottom 0.127: v13.73,16.5 v11.57,16.5
GND  (via drill 0.3)
  Top 0.127: EPD_C2.1 12.58,20.56 13.09,20.05 13.09,19.8 12.71,19.42 EPD_C1.1 12.58,19.29 | 12.58,19.29 12.2,19.67 10.8,19.67 J2.8 | 13.47,15.23 12.71,14.47 EPD_C7.1 | 13.47,15.23 13.47,16.12 12.96,16.63 12.58,16.63 | 12.58,16.63 EPD_C6.1 12.2,15.86 11.69,15.36 10.8,15.36 J2.17 | 12.58,17.9 12.07,17.39 12.07,17.13 12.58,16.63 | 12.58,16.63 EPD_C8.1 | 12.58,19.29 13.09,18.78 13.09,18.4 12.58,17.9 | 12.58,17.9 EPD_C5.1 | TP_GND.TP 8.01,8.62 | 8.14,10.91 8.14,10.28 8.52,9.89 8.52,9.13 8.01,8.62 | 8.01,8.62 EPD_C10.1 | v11.95,5.96 11.82,5.83 11.82,5.45 C30.1 | v12.71,3.42 13.47,4.18 SW_UP.1 13.6,4.31 14.61,4.31 C34.1 14.61,4.43 14.87,4.43 15.5,5.07 15.5,7.61 | 13.22,10.53 13.34,10.66 13.34,11.16 EPD_C11.1 | 13.22,10.53 13.09,10.4 12.84,10.4 12.45,10.78 EPD_C12.1 8.14,10.91 | 14.11,12.43 15.25,11.29 15.25,10.28 15.12,10.15 | 14.11,12.43 13.47,13.07 12.58,13.07 EPD_C9.1 | 15.12,10.15 13.6,10.15 13.22,10.53 | 15.5,7.61 15.5,9.77 15.12,10.15 | 8.14,10.91 J2.MP2 | 13.47,15.23 14.99,15.23 15.38,14.85 15.38,13.7 14.11,12.43 | 40.4,8.12 40.4,8.24 C17.1 40.4,8.12 | 40.4,8.12 40.4,7.99 40.65,7.74 40.78,7.74 41.79,6.72 R_TYPE_SEL.1 41.79,6.59 43.82,8.62 C21.2 | 40.4,8.12 39.76,8.12 | 39.76,8.12 36.97,8.12 | 36.97,8.12 C1.2 36.2,11.8 33.41,14.59 33.41,14.98 C20.2 33.28,15.1 32.85,15.53 30.79,15.53 30.23,14.98 X1.4 | 39.76,8.12 39.76,10.28 C18.1 | SJ1.1 37.98,2.91 36.97,3.93 36.97,8.12 | C27.1 24.9,5.32 | 24.9,5.32 24.52,5.32 | 24.52,5.32 C31.1 | 25.66,6.09 C32.1 25.53,6.66 25.03,7.17 25.03,7.61 | 24.9,5.32 25.41,5.83 25.41,6.09 25.66,6.09 | 25.66,6.09 29.09,6.09 IC2.B1 | 24.52,5.32 24.52,4.3 SW_ENT.1 | X1.2 31.51,13.83 31.25,13.83 30.23,14.85 X1.4
  Top 0.127: 26.93,11.8 28.33,11.8 TP2.TP | 26.93,11.8 25.92,11.8 | 26.93,11.8 26.93,15.61 27.57,16.24 28.46,16.24 29.73,14.98 30.11,14.98 X1.4 | 25.03,7.61 25.03,9.26 25.92,10.15 25.92,11.8 | 25.92,11.8 D4.1 | 25.03,7.61 15.5,7.61 | v32.39,20.03 31.14,20.03 IC1.D2 | C16.2 C15.2 | C3.2 C9.2 42.93,18.4 v43.06,18.53 | C10.2 C11.2 | C10.2 C2.2 | C10.2 | C11.2 C3.2 | C3.2 | C11.2 44.08,19.93 44.46,19.55 C16.2 | C16.2 | 37.35,22.85 37.47,22.98 37.73,22.98 37.85,22.85 | 37.35,22.85 36.97,22.47 C5.2 36.84,22.34 36.33,21.83 35.95,21.83 35.7,21.58 35.7,21.2 35.82,21.07 U1.P$B7 35.82,20.94 35.82,20.44 35.57,20.18 | 37.85,22.85 38.24,22.47 C13.2 | 37.85,22.85 38.36,23.36 C4.2 | 39.25,20.05 39.51,19.8 40.01,19.8 U1.P$F23 | 35.57,18.78 35.57,17.77 U1.P$83 | 35.57,18.78 U1.P$79 | 35.57,18.78 U1.P$74 | 37.85,16.5 36.84,16.5 U1.P$88 36.71,16.5 35.57,16.5 U1.P$87 | U1.P$84 36.84,17.77 36.84,18.4 U1.P$74 | U1.P$80 36.84,18.91 U1.P$74 | 37.85,16.5 U1.P$89 37.98,16.5 39.12,16.5 U1.P$90 | 37.85,16.5 37.6,17.39 | 37.6,17.39 37.85,17.64 U1.P$85 | 37.6,17.39 U1.P$74 | 37.98,18.91 U1.P$81 U1.P$74 | U1.P$76 36.71,20.05 36.2,19.55 U1.P$74 | U1.P$77 37.98,20.05 38.62,19.42 U1.P$74 | 39.12,18.78 39.12,17.77 U1.P$86 | 39.12,18.78 U1.P$82 | 39.12,18.78 U1.P$74 | 39.25,20.05 U1.P$78 | 39.25,20.05 U1.P$74 | 35.57,20.18 U1.P$75 | 35.57,20.18 U1.P$74 | 32.77,5.58 34.43,5.58 35.44,4.56 35.44,4.31 SW_DN.1 | 29.6,3.16 28.84,3.16 U3.6 | U3.9 29.73,2.91 30.23,2.4 30.62,2.4 U3.1 | 30.11,3.67 30.62,3.67 U3.4 | 29.6,3.16 30.11,3.67 | 29.6,3.16 U3.9 | v29.98,7.99 29.47,7.48 IC2.B3 | v30.11,4.18 30.11,3.67 | 30.11,3.67 U3.9 | v32.27,5.58 32.77,5.58 | 32.77,5.58 C29.1 | 23.76,22.47 C19.2
  Top 0.127: 23.76,22.47 23.38,22.47 | IC3.8 26.55,19.55 26.3,19.55 IC3.9 26.17,19.67 25.66,20.18 25.66,20.94 | 25.66,20.94 25.66,22.09 C7.2 | 23.76,22.47 23.76,21.45 24.27,20.94 25.66,20.94 | D1.2 16.26,32.37 16.9,33.01 17.92,33.01 18.93,31.99 J4.SH2 | R9.1 14.49,20.82 | 14.49,20.82 14.49,21.2 C37.1 | 16.65,21.71 16.65,21.96 IC9.B1 | 16.65,21.71 16.65,21.58 | 16.65,21.58 IC9.C2 IC9.C3 21.09,21.58 21.47,21.96 21.47,23.23 19.57,25.13 18.8,25.13 18.55,25.39 18.55,26.02 | 16.65,21.58 IC9.C1 | 14.49,20.82 15.76,20.82 16.65,21.71 | R2_USB.2 20.96,26.28 20.71,26.28 20.2,26.79 20.2,27.17 J4.A12_B1 20.07,27.17 19.82,26.91 | 19.82,26.91 19.06,26.15 C1-EP-DR.2 18.55,26.02 | 19.82,26.91 18.93,27.8 J4.SH4 | 14.11,23.36 14.11,22.47 14.23,22.34 C39.2 | 14.11,23.36 14.11,23.74 C38.2 | C33.2 C25.2 16.77,24.88 | 16.77,24.88 16.39,25.26 15.88,25.26 15.76,25.13 15.76,25.01 C23.2 15.63,24.88 C24.1 15.5,24.12 14.74,23.36 14.11,23.36 | 18.55,26.02 17.92,26.02 16.77,24.88 | v22.74,22.47 23.38,22.47 | 23.38,22.47 R3.1 | C42.2 14.23,31.36 14.23,32.37 C43.2 14.11,32.5 13.85,32.75 | J2.MP1 8.14,24.12 8.14,25.77 9.66,27.29 C6.2 9.79,29.71 12.96,32.88 13.73,32.88 13.85,32.75 | C8.2 45.22,14.21 45.35,14.34 45.35,19.67 42.3,22.72 41.28,22.72 40.52,23.48 C22.2 40.27,32.12 38.62,33.77 31.63,33.77 | 27.19,23.74 26.81,23.74 | 26.81,23.74 26.55,23.74 R1_USB.1 | 27.19,23.74 27.82,23.1 C12.2 | 26.81,23.74 26.04,22.98 C14.2 | 27.06,26.28 27.06,26.79 26.81,27.04 | 26.81,27.04 26.68,27.17 J4.A1_B12 26.81,27.04 | J1.3 J1.5 33.92,30.09 v33.41,29.58 | 26.81,27.04 27.7,27.93 J4.SH3 | 27.19,23.74 27.19,25.13 27.44,25.39 27.44,25.9 27.06,26.28
  Top 0.127: 27.06,26.28 R2_EP_DR.1 | 31.63,33.77 29.6,33.77 27.82,31.99 J4.SH1 25.92,33.77 14.87,33.77 13.85,32.75 | 37.35,22.85 35.06,25.13 33.41,25.13 31.63,26.91 31.63,33.77
  Bottom 0.127: v11.95,5.96 11.95,4.18 v12.71,3.42 12.96,3.42 13.47,3.93 29.85,3.93 v30.11,4.18 30.11,5.58 | U1.P$75 35.5,20.03 v32.39,20.03 | v43.06,18.53 41.41,18.53 40.65,17.77 39.25,17.77 U1.P$86 | U1.P$87 29.98,10.91 v29.98,7.99 30.11,7.86 30.11,5.58 | 30.11,5.58 v32.27,5.58 | J4.SH2 19.06,27.93 J4.SH4 19.06,27.8 22.74,24.12 v22.74,22.47 | 29.47,29.58 v33.41,29.58 | 29.47,29.58 27.82,27.93 J4.SH3 | 29.47,29.58 27.82,31.23 27.82,31.99 J4.SH1 J4.SH2 | J4.SH2
IMU_INT1
  Top 0.127: U1.P$N1 33.9,18.23 28.25,18.23 27.95,18.53 27.31,18.53 IC3.5
IMU_INT2  (via drill 0.3)
  Top 0.127: U1.P$P2 v31.96,17.77 31.99,17.79
  Top 0.152: IC3.6 28.49,19.03 v28.86,18.66
  Route2 0.152: v28.86,18.66 28.51,18.3 v28.51,17.54
  Route63 0.152: v28.51,17.54 29.12,16.93 31.12,16.93 v31.96,17.77 32.01,17.77
LX1
  Top 0.127: 17.41,21.96 17.03,21.96 IC9.B2 | 17.41,21.96 19.44,21.96 20.07,22.59 L7.1 | 17.41,21.96 IC9.B3
LX2
  Top 0.127: 17.41,21.2 17.03,21.2 IC9.D2 | 17.41,21.2 19.44,21.2 20.07,20.56 L7.2 | 17.41,21.2 IC9.D3
N$1
  Top 0.127: IC9.D1 16.65,21.2 16.52,21.2 15.12,19.8 15.12,18.78 R4.2
N$2
  Top 0.127: R3.2 23.38,20.18 25.66,17.9 IC3.1
N$3  (via drill 0.3)
  Top 0.127: IC9.E1 16.65,20.69 16.65,20.05 v16.39,19.8 15.63,19.04 R2.2 | v26.17,25.64 27.06,25.64 R2_EP_DR.2 | v23,9.77 23,9.13 Q3.1
  Route2 0.127: v26.17,25.64 24.01,25.64 18.68,20.31 16.9,20.31 v16.39,19.8
  Bottom 0.127: v23,9.77 23,12.94 16.39,19.55 v16.39,19.8
N$4
  Top 0.127: 20.2,10.4 20.84,9.77 Q3.3 | 20.2,10.4 19.82,10.78 C2-EP-DR.2 19.19,10.91 18.04,12.05 18.04,14.34 D5.2 | L5.1 20.2,10.4
N$5  (via drill 0.3)
  Top 0.127: 13.73,31.36 13.73,32.25 C43.1 | v29.55,19.57 29.9,19.93 30.62,19.93 IC1.D1 | v27.82,18.02 27.19,17.39 27.19,17.26 26.81,16.88 24.27,16.88 23.5,17.64 21.34,17.64 20.71,17.01 18.55,17.01 18.3,16.75 15.76,16.75 14.11,18.4 14.11,19.29 14.49,19.67 | 13.73,31.36 13.73,30.72 13.47,30.47 13.47,21.71 14.11,21.07 14.11,20.05 14.49,19.67 | 13.73,31.36 C42.1 | 14.49,19.67 R9.2
  Bottom 0.127: v27.82,18.02 29.09,18.02 29.55,18.48 v29.55,19.57
N$6
  Top 0.127: D2.1 17.92,10.78 18.42,10.28 C2-EP-DR.1 19.19,10.15 20.07,9.26 21.47,9.26 21.73,9.51 21.73,10.28 22.36,10.91 24.14,10.91 24.39,11.16 24.39,11.67 25.92,13.2 D4.2
N$7  (via drill 0.3)
  Top 0.127: v30.49,9.77 29.85,9.13 26.55,9.13 R1_EP_DR.1 | v37.47,5.45 37.47,5.2 SJ1.2 39.76,5.96 41.79,5.96 R_TYPE_SEL.2
  Bottom 0.127: v30.49,9.77 33.16,9.77 v37.47,5.45
N$8
  Top 0.127: C32.2 26.07,7.44 26.07,7.74 28.2,7.74 IC2.A2
N$9  (via drill 0.3)
  Top 0.127: R1_USB.2 26.55,24.75 v26.68,24.88 | v25.54,29.2 25.15,29.2 24.52,28.56 24.52,27.29 J4.A5
  Bottom 0.127: v26.68,24.88 26.68,27.04 25.54,28.18 v25.54,29.2
N$10
  Top 0.127: EPD_C2.2 12.58,21.32 11.57,21.32 11.18,21.71 10.8,21.71 J2.4
N$11
  Top 0.127: EPD_C1.2 12.58,20.05 12.33,20.05 11.18,21.2 10.8,21.2 J2.5
N$14
  Top 0.127: R2_USB.1 20.96,25.64 21.09,25.64 21.6,26.15 21.6,27.17 J4.B5
N$17  (via drill 0.3)
  Top 0.127: v35.82,15.48 35.44,15.48 U1.P$AC5 | v33.54,13.83 33.54,14.09 32.65,14.98 C20.1
  Bottom 0.127: v35.82,15.48 35.19,15.48 v33.54,13.83
N$19
  Top 0.127: EPD_C6.2 13.09,15.74 12.71,15.36 12.07,15.36 11.57,14.85 10.8,14.85 J2.18
N$21
  Top 0.127: EPD_C7.2 12.07,14.98 11.44,14.34 10.8,14.34 J2.19
N$22
  Top 0.127: EPD_C8.2 12.58,17.39 13.34,18.15 13.34,21.45 11.18,23.61 10.3,23.61 10.17,23.48 10.17,13.96 10.3,13.83 10.68,13.83 J2.20
N$24
  Top 0.127: EPD_C10.2 8.01,10.02 7.38,10.66 7.38,11.29 8.77,12.69 10.68,12.69 J2.22
N$26
  Top 0.127: EPD_C12.2 12.96,11.04 12.45,11.55 10.93,11.55 10.8,11.67 J2.24
N$46
  Top 0.127: U1.P$N24 40.65,18.02 41.54,18.02 41.92,18.4 C9.1
N$49  (via drill 0.3)
  Top 0.127: C3.1 41.16,19.17 | 41.16,19.17 41.03,19.17 40.78,19.42 40.52,19.42 40.4,19.29 40.14,19.29 U1.P$H23 | v40.4,21.96 L1.1 | 41.16,19.17 v41.16,18.91
  Route2 0.127: v40.4,21.96 40.4,19.55 41.03,18.91 v41.16,18.91
N$51
  Top 0.127: 41.92,21.45 40.14,21.45 U1.P$A23 | 41.92,21.45 42.43,21.96 42.68,21.96 45.09,19.55 45.09,14.47 44.71,14.09 44.71,7.61 39.12,2.02 37.35,2.02 36.71,2.66 36.71,4.18 35.32,5.58 35.32,7.99 33.92,9.39 33.92,12.69 32.14,14.47 32.01,14.47 31.63,14.85 X1.3 | 41.92,21.45 C2.1
N$52  (via drill 0.3)
  Top 0.127: v39.63,21.07 40.52,21.07 U1.P$B24 | v29.22,14.85 29.22,14.59 30.11,13.7 X1.1 30.23,13.7 30.87,13.07 31.38,13.07 33.16,11.29 v33.41,11.29 | v35.57,8.75 35.57,8.12 C1.1
  Route63 0.127: v39.63,21.07 35.7,21.07 32.52,17.9 32.52,16.47 30.9,14.85 v29.22,14.85
  Bottom 0.127: v35.57,8.75 35.57,9.13 v33.41,11.29
N$58
  Top 0.127: U1.P$A18 38.62,21.58 38.24,21.96 37.98,21.96 37.47,22.47 C13.1
N$69
  Top 0.127: U1.P$B3 34.93,21.07 34.93,21.83 35.32,22.21 35.32,22.59 L2.1
N$70
  Top 0.127: L2.2 33.92,22.59 L3.1
OUT+
  Top 0.127: TP_OP.TP 31,9.64 29.09,7.74 29.09,7.48 IC2.A3
OUT-
  Top 0.127: TP_ON.TP 33.16,7.48 29.98,7.48 IC2.C3
P0.00/XL1  (via drill 0.3)
  Top 0.127: v33.31,20.54 33.64,20.21 34.57,20.21 U1.P$D2 | v35.57,11.8 34.81,11.04 X2.2 | v40.4,8.88 40.78,8.5 40.78,8.24 C17.2
  Bottom 0.127: v33.31,20.54 35.16,20.54 35.32,20.69 37.09,20.69 37.35,20.44 37.35,16.12 35.57,14.34 v35.57,11.8 38.49,8.88 v40.4,8.88
P0.01/XL2  (via drill 0.3)
  Top 0.127: v31.68,18.94 32.06,18.94 33.08,19.95 34.15,19.95 34.3,19.8 34.55,19.8 U1.P$F2 | v30.95,17.57 30.95,17.03 31.98,15.79 33.28,15.79 34.04,15.03 34.04,14.34 37.09,11.29 37.09,11.04 X2.1 37.22,11.04 37.47,10.78 39.89,10.78 40.14,10.53 40.14,10.28 C18.2
  Bottom 0.127: v30.95,17.57 31.2,17.82 31.2,18.45 v31.68,18.94
P0.13/1.5D
  Top 0.127: SW_UP.2 10.68,4.31 10.68,4.56 11.31,5.2 11.31,5.45 C30.2 11.44,5.45 11.44,6.09 11.82,6.47 12.07,6.47 12.45,6.09 12.45,5.32 R5.1
P0.14/1.5D
  Top 0.127: R8.1 22.62,5.32 | 22.62,5.32 22.49,5.32 21.73,4.56 21.73,4.29 SW_ENT.2 | 22.62,5.32 C31.2
P1.01/1.6C
  Top 0.127: R_PWR_EPD.1 25.54,26.02 24.14,24.63 24.14,23.99 DMG2305UX-7.1
P1.02/1.6C
  Top 0.127: 32.77,6.09 32.14,6.09 31.76,5.7 31.76,5.07 32.52,4.31 SW_DN.2 | 32.77,6.09 33.54,6.09 34.68,7.23 34.68,8.24 33.66,9.26 33.66,10.4 31.51,12.56 30.11,12.56 29.47,13.2 29.47,13.83 28.08,15.23 27.82,15.23 R7.1 | 32.77,6.09 C29.2
P1.09  (via drill 0.3)
  Top 0.127: v40.14,18.28 40.4,18.53 40.52,18.53 U1.P$L24 | v33.51,17.18 33.76,17.18 U1.P$R1
  Route2 0.127: v33.51,17.18 34.2,17.18 34.78,17.58 34.94,17.9 34.96,17.92 35.29,18.28 v40.14,18.28
PMIC_INT  (via drill 0.3)
  Top 0.127: v29.98,21.32 30.11,21.2 30.62,21.2 IC1.A1 | v34.55,16.75 34.55,17.23 U1.P$T2
  Bottom 0.127: v34.55,16.75 v29.98,21.32
PREVGH
  Top 0.127: J2.21 10.8,13.32 11.18,13.32 11.57,13.7 EPD_C9.2 12.58,13.83 13.09,14.34 D5.1
PREVGL
  Top 0.127: J2.23 10.8,12.31 11.18,12.31 11.31,12.43 EPD_C11.2 12.58,12.56 14.36,10.78 D2.2
RESE  (via drill 0.3)
  Top 0.127: v26.55,10.15 R1_EP_DR.2 | v25.28,10.15 23.38,10.15 23.12,10.4 Q3.2 | v11.57,21.96 11.31,22.21 10.8,22.21 J2.3
  Bottom 0.127: v26.55,10.15 v25.28,10.15 24.39,9.26 22.87,9.26 11.57,20.56 v11.57,21.96
RESET  (via drill 0.2, 0.3)
  Top 0.127: v32.77,26.79 32.77,27.29 33.92,28.44 33.92,28.82 J1.6 | v28.96,13.7 28.96,13.2 30.87,11.29 TP_RESET.TP
  Route2 0.127: v32.77,26.79 32.77,26.53 34.55,24.75 34.93,24.75 35.32,24.37 34.93,23.99 34.17,23.99 32.77,22.59 32.14,22.59 30.11,20.56 30.11,14.85 v28.96,13.7
  Route2 0.152: U1.P$AC13 37.35,13.2 37.22,13.07 29.6,13.07 v28.96,13.7
  other vias: 37.35,15.53
RF  (via drill 0.3)
  Top 0.127: C4.1 37.09,23.48 35.19,25.39 33.54,25.39 31.89,27.04 31.89,31.48 33.92,33.52 38.49,33.52 39.63,32.37 39.63,24.12 | 39.63,23.48 39.63,24.12 | 39.63,23.48 39.51,23.36 39.51,22.72 L1.2 | 39.63,23.48 C22.1 | v40.9,23.86 ANT1.1 | 39.63,24.12 v39.76,24.12
  Bottom 0.127: v40.9,23.86 40.01,23.86 v39.76,24.12
SCL/1.4C
  Top 0.127: IC2.C1 29.85,6.47 29.85,5.7 28.08,3.93 28.08,3.16 28.33,2.91 28.71,2.91 U3.7
SCL/2.4C  (via drill 0.2, 0.3)
  Top 0.127: R4.1 14.49,18.78 14.49,18.66 v14.99,18.15 16.01,17.13 17.03,17.13 R17.2 17.15,17.13 18.3,17.13 18.42,17.26 20.58,17.26 v22.74,19.42 | v29.22,20.69 30.62,20.69 IC1.B1 | v25.15,20.44 25.15,20.18 24.65,19.67 24.65,19.42 25.54,18.53 IC3.12 | v10.8,25.52 TP_SCL.TP | v29.47,17.54 29.47,17.11 29.02,16.65 29.32,16.35 v29.47,16.35 | v33.08,16.45 32.72,16.8 v31.96,16.8
  Route2 0.127: U1.P$M2 v33.36,19.52 32.94,19.1 32.94,16.59 v33.08,16.45 | v31.96,16.8 31.5,16.35 31.23,16.35 31.23,15.91 31.02,15.71 30.57,16.17 30.57,16.24 v30.67,16.35
  Route63 0.127: v29.22,20.69 30.34,19.57 30.34,18.94 30.87,18.94 | 30.87,18.94 30.92,18.94 30.97,18.99 | 30.87,18.94 v29.47,17.54 | v30.67,16.35 v29.47,16.35
  Bottom 0.127: v29.22,20.69 25.41,20.69 v25.15,20.44 24.01,20.44 23,19.42 v22.74,19.42 | v10.8,25.52 10.8,23.36 14.99,19.17 v14.99,18.15
  other vias: 34.6,18.28
SDA/1.4C  (via drill 0.3)
  Top 0.152: U3.8 27.52,2.29 27.39,2.42 27.39,2.96 v27.06,3.29
  Route2 0.152: IC2.B2 29.47,6.77 29.29,6.59 27.67,6.59 27.67,3.29 v27.06,3.29
  other vias: 29.47,6.97
SDA/2.4C
  Top 0.127: 28.96,19.8 28.96,19.55 30.03,18.48 32.22,18.48 32.81,19.07 33.61,19.01 U1.P$L1 | 28.96,19.8 29.47,20.31 30.62,20.31 IC1.C1 | 17.54,19.04 17.15,18.66 16.65,18.66 16.39,18.91 16.39,19.04 R2.1 | 22.23,19.93 21.47,19.93 20.33,18.78 TP_SDA.TP 19.57,19.04 17.54,19.04 | 22.23,19.93 22.87,19.93 25.28,17.52 25.79,17.52 26.17,17.9 IC3.2 | 17.54,19.04 R18.2 | 28.96,19.8 28.46,19.8 25.66,22.59 24.77,22.59 24.39,22.98 22.62,22.98 22.23,22.59 22.23,19.93
SWDCLK  (via drill 0.3)
  Top 0.127: U1.P$AA24 40.65,15.99 41.66,15.99 42.55,16.88 TP_SWDCLK.TP 42.68,16.88 v43.7,17.9 | v35.82,28.31 35.32,28.82 J1.4
  Bottom 0.127: v35.82,28.31 37.22,28.31 37.35,28.44 38.49,28.44 43.19,23.74 43.19,20.31 43.95,19.55 43.95,18.15 v43.7,17.9
SWDIO  (via drill 0.3)
  Top 0.127: 42.05,15.48 43.32,15.48 TP_SWDIO.TP | 42.05,15.48 40.65,15.48 U1.P$AC24 | v37.47,24.37 36.2,25.64 36.2,27.42 36.46,27.67 36.46,28.82 J1.2 | 42.05,15.48 v42.05,15.61
  Route2 0.127: v37.47,24.37 39.25,22.59 40.65,22.59 41.16,22.09 41.16,21.96 42.05,21.07 v42.05,15.61
SWO
  Top 0.127: TP_SWO.TP 39.63,13.07 39.63,14.98 U1.P$AD22
VBAT/1.2A
  Top 0.127: U3.3 30.74,3.16 30.74,2.91 U3.2 30.74,2.78 31,2.78 31.38,2.4 31.38,2.15 31.12,1.89 27.82,1.89 27.19,1.26 TP1.TP 26.04,1.89 26.04,5.32 C27.2
VBAT/2.5C  (via drill 0.3)
  Top 0.127: v32.52,21.96 32.52,21.07 31.76,20.31 31.12,20.31 IC1.C2 | v15.88,21.71 15.38,21.71 14.87,21.2 C37.2
  Bottom 0.127: v32.52,21.96 31.89,21.96 29.85,23.99 25.79,23.99 23.5,21.71 v15.88,21.71
VBUS/1.5D  (via drill 0.3)
  Top 0.127: 21.22,28.44 21.22,28.56 20.58,29.2 18.04,29.2 17.54,28.69 16.9,28.69 16.26,29.33 D1.5 | 21.22,28.44 21.22,28.31 21.09,28.18 21.09,27.29 J4.A9_B4 | v25.03,28.44 25.66,27.8 25.66,27.29 J4.A4_B9 | 21.22,28.44 v22.11,28.44
  Bottom 0.127: v22.11,28.44 v25.03,28.44
VBUS/2.6D  (via drill 0.3)
  Top 0.127: v36.33,14.47 35.19,14.47 34.68,14.98 U1.P$AD2 | v40.78,10.02 41.92,10.02 43.19,8.75 C21.1 | C38.1 14.49,23.74 14.49,25.52 14.74,25.77 14.74,32.75 15.25,33.26 23.88,33.26 28.58,28.56 28.58,23.48 29.73,22.34 29.98,22.34 31,21.32 31,21.2 IC1.A2 31.12,21.2 v31.63,21.2
  Route2 0.127: v36.33,14.47 33.77,14.47 32.52,15.71 32.52,19.11 31.63,20 v31.63,21.2
  Bottom 0.127: v40.78,10.02 v36.33,14.47
VREG
  Top 0.127: C24.2 16.14,24.88 C23.1 | 17.03,22.34 16.65,22.34 | 17.03,22.34 17.41,22.34 IC9.A3 | 17.03,22.34 IC9.A2 | 16.65,22.34 16.14,22.34 | 16.14,22.34 C39.1 14.87,22.21 14.49,21.83 14.23,21.83 13.73,22.34 13.73,30.34 14.49,31.1 14.49,32.88 15.12,33.52 24.01,33.52 30.23,27.29 30.23,23.48 TP_VREG.TP 32.14,21.71 32.14,21.07 31.76,20.69 31.12,20.69 IC1.B2 | 16.65,22.34 IC9.A1 | 16.14,22.34 C24.2 | C24.2